# EAGLE board SparkFun LoRaSerial - 1W-Panel (EAGLE 9.6.2), part 1 of 4
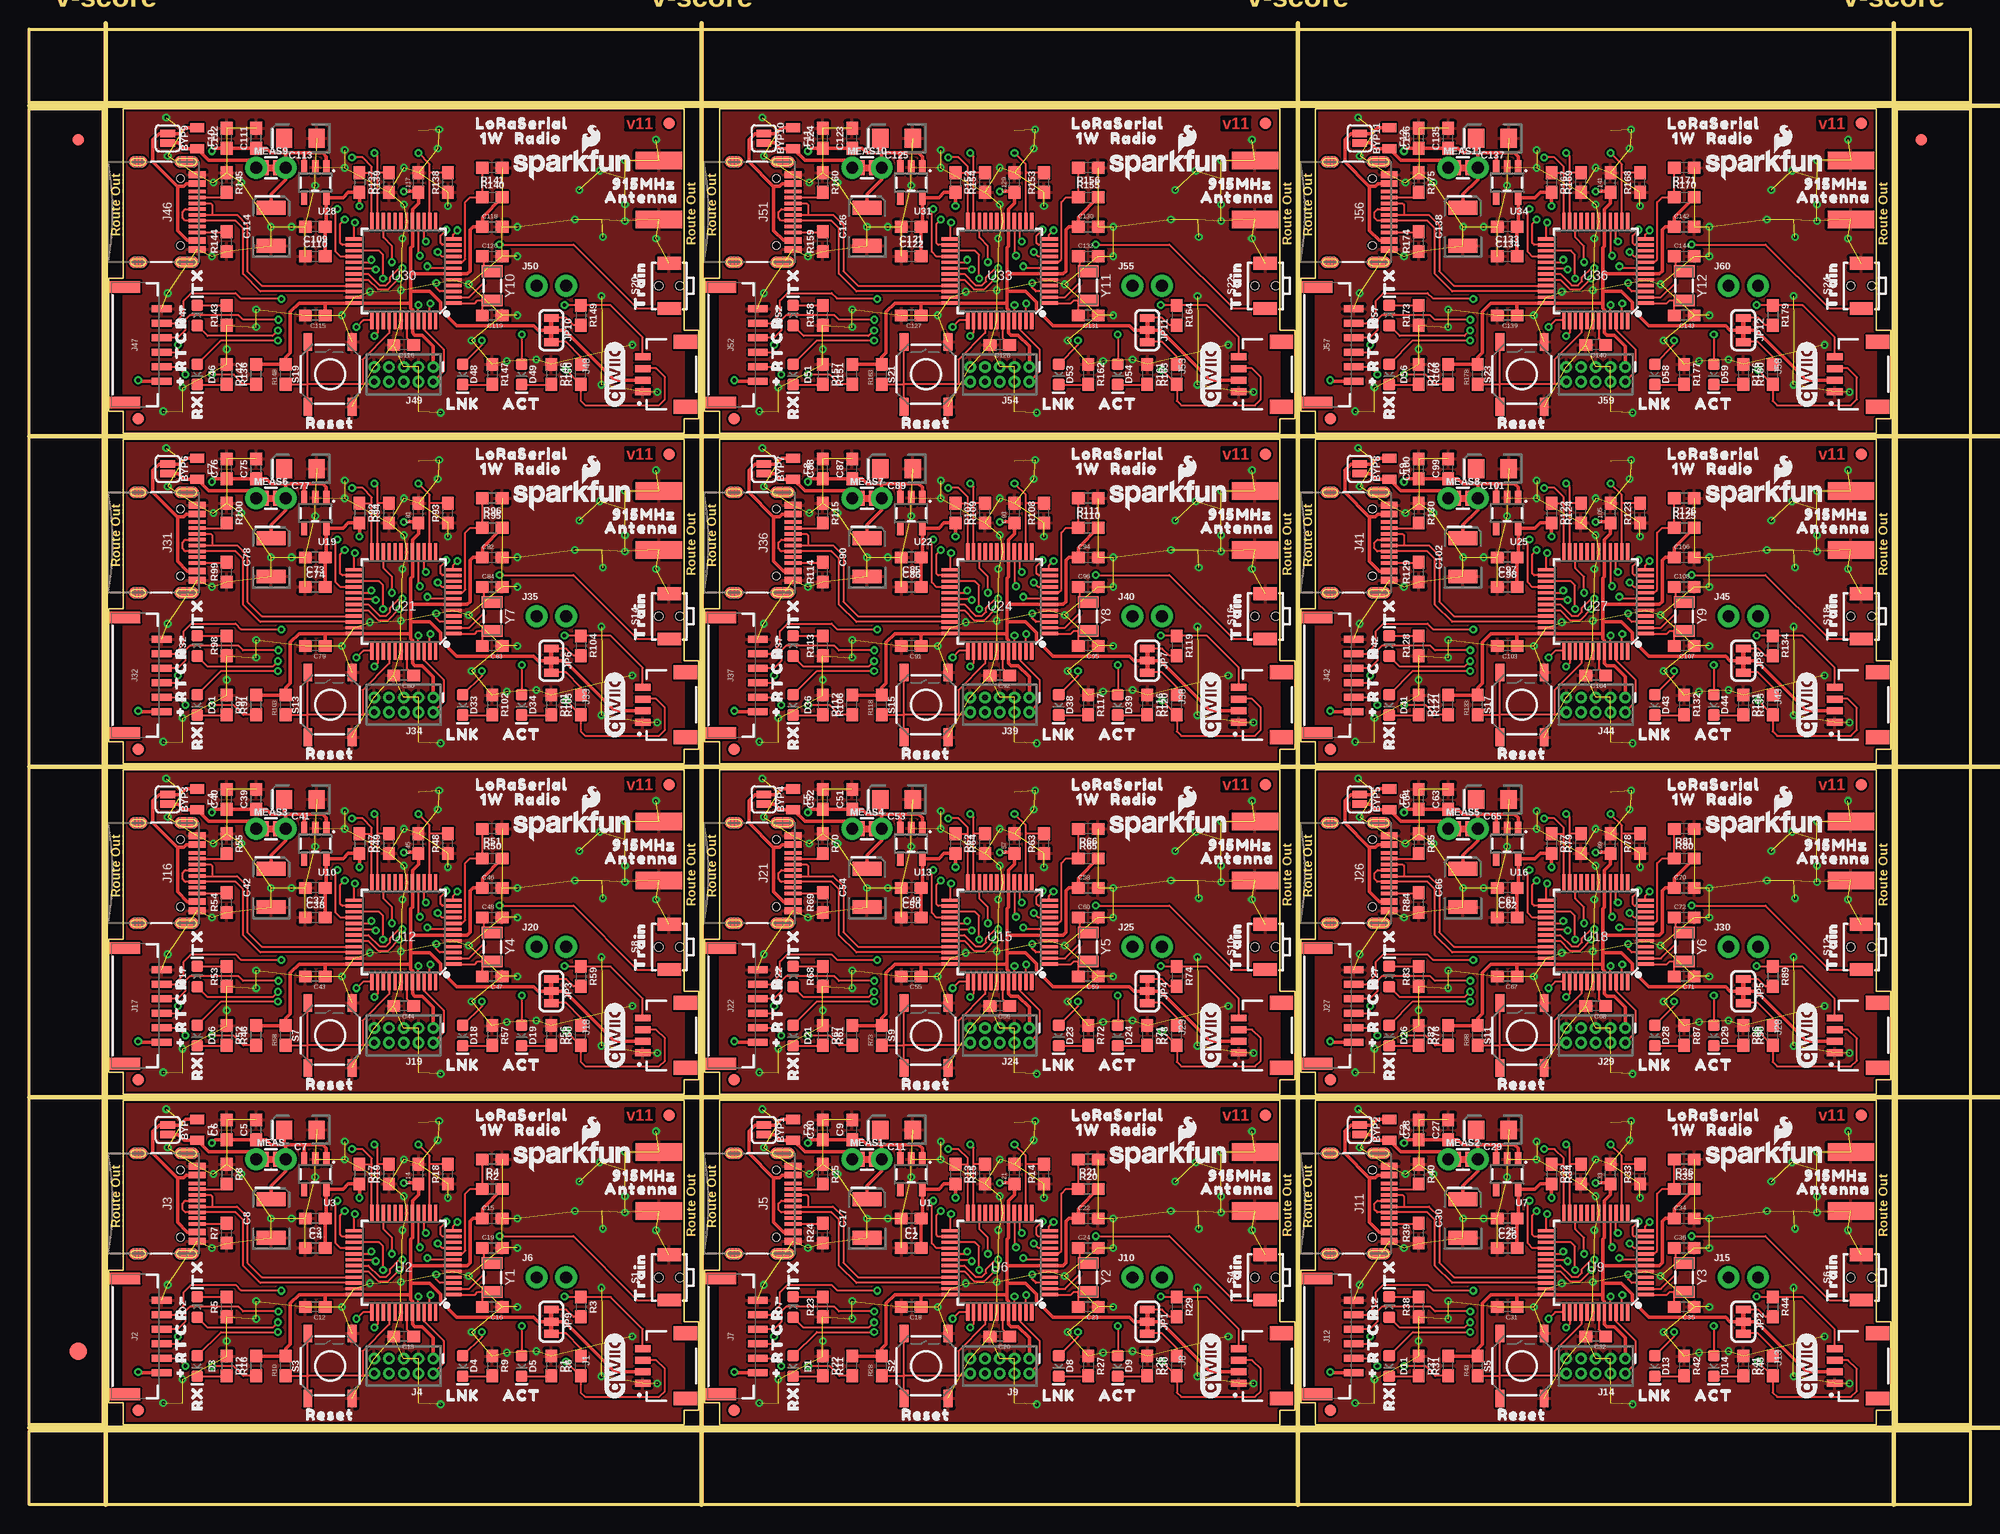
[diagram p0: board, top side]
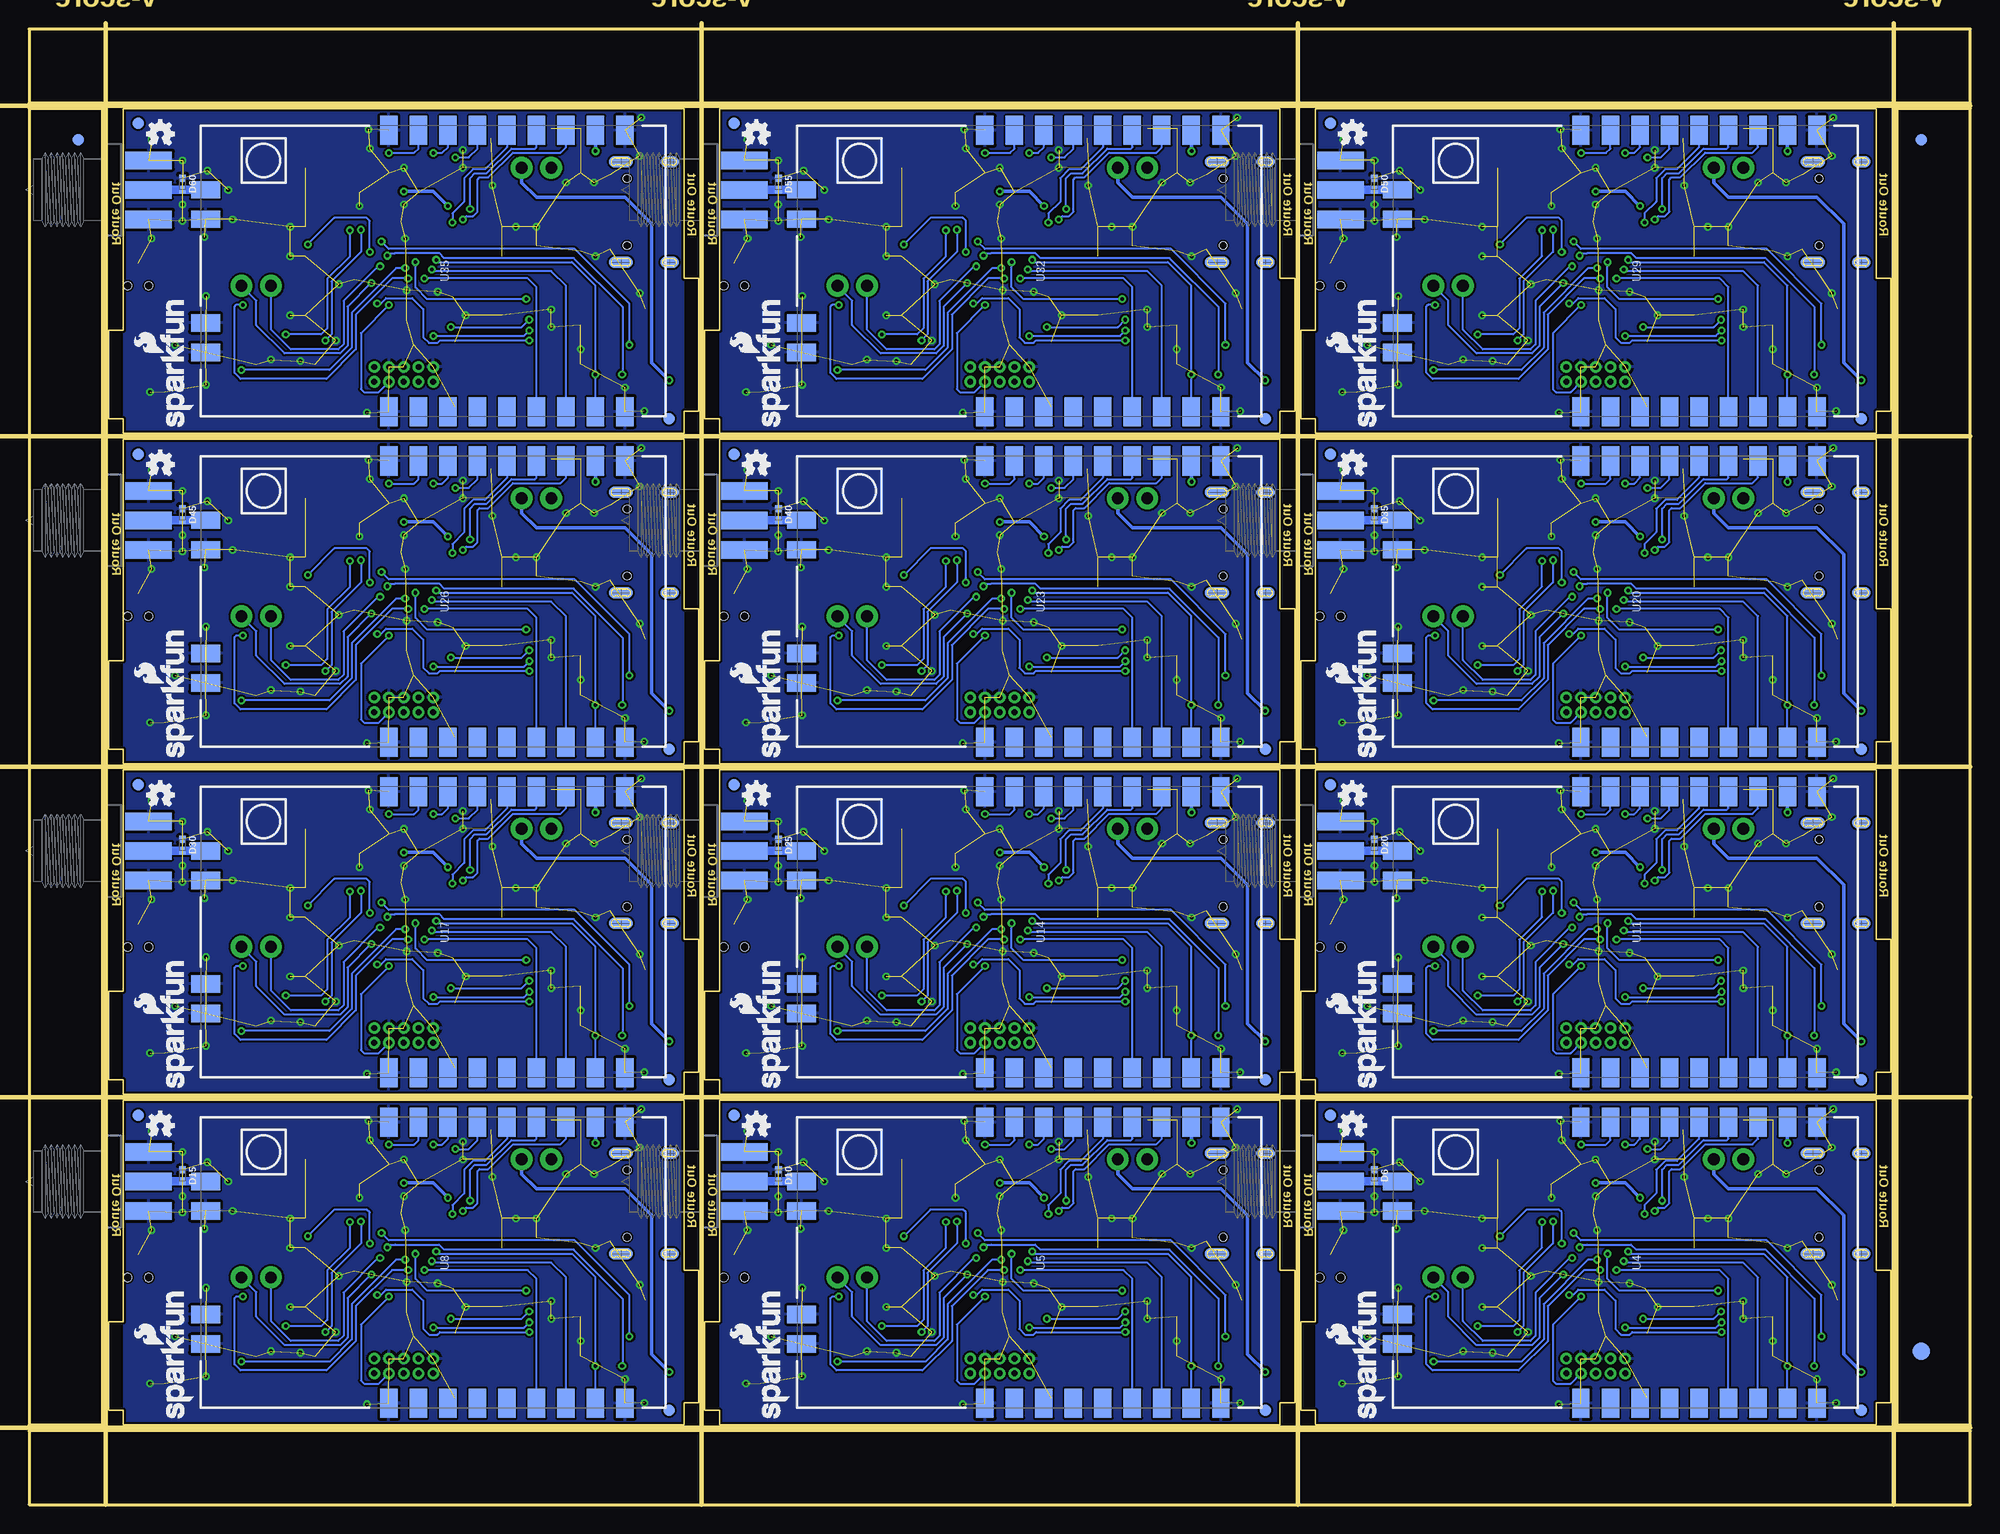
[diagram p1: board, bottom side, seen from below]

Size 167.13 x 127 mm. Coordinates in mm from the lower left corner, seen from the top.
Outline: 8.13,6.86 8.13,8.76 6.86,8.76 6.86,20.19 8.13,20.19 8.13,34.8 56.39,34.8 56.39,15.75 57.66,15.75 57.66,8.13 56.39,8.13 56.39,6.86 8.13,6.86
Outline: 59.44,6.86 59.44,8.76 58.17,8.76 58.17,20.19 59.44,20.19 59.44,34.8 107.7,34.8 107.7,15.75 108.97,15.75 108.97,8.13 107.7,8.13 107.7,6.86 59.44,6.86
Outline: 110.74,6.86 110.74,8.76 109.47,8.76 109.47,20.19 110.74,20.19 110.74,34.8 159,34.8 159,15.75 160.27,15.75 160.27,8.13 159,8.13 159,6.86 110.74,6.86
Outline: 8.13,35.31 8.13,37.21 6.86,37.21 6.86,48.64 8.13,48.64 8.13,63.25 56.39,63.25 56.39,44.2 57.66,44.2 57.66,36.58 56.39,36.58 56.39,35.31 8.13,35.31
Outline: 59.44,35.31 59.44,37.21 58.17,37.21 58.17,48.64 59.44,48.64 59.44,63.25 107.7,63.25 107.7,44.2 108.97,44.2 108.97,36.58 107.7,36.58 107.7,35.31 59.44,35.31
Outline: 110.74,35.31 110.74,37.21 109.47,37.21 109.47,48.64 110.74,48.64 110.74,63.25 159,63.25 159,44.2 160.27,44.2 160.27,36.58 159,36.58 159,35.31 110.74,35.31
Outline: 8.13,63.75 8.13,65.66 6.86,65.66 6.86,77.09 8.13,77.09 8.13,91.69 56.39,91.69 56.39,72.64 57.66,72.64 57.66,65.02 56.39,65.02 56.39,63.75 8.13,63.75
Outline: 59.44,63.75 59.44,65.66 58.17,65.66 58.17,77.09 59.44,77.09 59.44,91.69 107.7,91.69 107.7,72.64 108.97,72.64 108.97,65.02 107.7,65.02 107.7,63.75 59.44,63.75
Outline: 110.74,63.75 110.74,65.66 109.47,65.66 109.47,77.09 110.74,77.09 110.74,91.69 159,91.69 159,72.64 160.27,72.64 160.27,65.02 159,65.02 159,63.75 110.74,63.75
Outline: 8.13,92.2 8.13,94.11 6.86,94.11 6.86,105.54 8.13,105.54 8.13,120.14 56.39,120.14 56.39,101.09 57.66,101.09 57.66,93.47 56.39,93.47 56.39,92.2 8.13,92.2
Outline: 59.44,92.2 59.44,94.11 58.17,94.11 58.17,105.54 59.44,105.54 59.44,120.14 107.7,120.14 107.7,101.09 108.97,101.09 108.97,93.47 107.7,93.47 107.7,92.2 59.44,92.2
Outline: 110.74,92.2 110.74,94.11 109.47,94.11 109.47,105.54 110.74,105.54 110.74,120.14 159,120.14 159,101.09 160.27,101.09 160.27,93.47 159,93.47 159,92.2 110.74,92.2
Outline: 0,6.35 167.13,6.35 167.13,0 0,0 0,6.35
Outline: 160.78,120.14 167.13,120.14 167.13,6.86 160.78,6.86 160.78,120.14
Outline: 0,127 167.13,127 167.13,120.65 0,120.65 0,127
Outline: 0,120.14 6.35,120.14 6.35,6.86 0,6.86 0,120.14
Copper layers (1*16): Top 0.035mm / dielectric 1.5mm / Bottom 0.035mm
Design rules "SparkFun LoRaSerial - 1W": minimum track width 7mil, minimum drill 0.3mm, track to track 7mil, track to pad 7mil, pad to pad 7mil, via to via 7mil, smd to smd 7mil, copper to edge 7mil, drill to drill 7mil, minimum pad ring 7mil, minimum via ring 7mil, stop-mask expansion 3mil, vias tented up to drill 25mil, thermal gap 10mil
Net classes: 1 3.3V: width 0.305 mm
Milling: 9 lines

## Footprints (pad centres in the part's own frame; a part is rotated, then mirrored left to right if it is on the bottom)
SMT-JUMPER_2_NO_SILK = smd 0.635 x 1.27: 1 -0.406,0; 2 0.406,0
0603 = smd 1.1 x 1: 1 -0.85,0; 2 0.85,0
EIA3216 = smd 1.4 x 1.6: + 1.4,0; - -1.4,0
EIA3528 = smd 1.2 x 2.5: A 1.65,0; C -1.65,0
LED-0603 = smd 1 x 1: A -0.877,0; C 0.877,0
0402-TIGHT = smd 0.6 x 0.6: 1 -0.5,0; 2 0.5,0
RP-SMA-EDGE = smd 1.5 x 4: GND@0 -2.54,0; GND@1 2.54,0; SIG 0,0 | smd 1.5 x 4 bottom: GND@2 -2.54,0; GND@3 2.54,0
FIDUCIAL-1X2 = smd 1 x 1: 1 0,0
FIDUCIAL-1.5X3 = smd 1.5 x 1.5: 1 0,0
0805 = smd 0.8 x 1.2: 1 -0.9,0; 2 0.9,0
JST04_1MM_RA = smd 0.6 x 1.35: 1 -1.5,0; 2 -0.5,0; 3 0.5,0; 4 1.5,0 | smd 1.2 x 2: NC1 2.8,-3.675; NC2 -2.8,-3.675
JST-6-SMD-1.25MM-LOCKING = smd 0.6 x 1.7: 1 -3.125,3.3; 2 -1.875,3.3; 3 -0.625,3.3; 4 0.625,3.3; 5 1.875,3.3; 6 3.125,3.3 | smd 1 x 2.7: NC1 4.975,0.1; NC2 -4.975,0.1
USB-C-16P = smd 0.3 x 1.45: A5 -1.25,0; A6 -0.25,0; A7 0.25,0; A8 1.25,0; B5 1.75,0; B6 0.75,0; B7 -0.75,0; B8 -1.75,0 | smd 0.6 x 1.45: GND -3.225,0; GND2 3.225,0 | smd 1 x 2.1: SHLD1 -4.32,-0.915; SHLD2 4.32,-0.915 | smd 1 x 2.1 bottom: SHLD3 -4.32,-0.915; SHLD4 4.32,-0.915 | smd 1 x 1.6: SHLD5 -4.32,-5.095; SHLD8 4.32,-5.095 | smd 1 x 1.6 bottom: SHLD6 -4.32,-5.095; SHLD7 4.32,-5.095 | smd 0.55 x 1.45: VBUS1 -2.45,0; VBUS2 2.45,0 | hole 0.65: -2.89,-1.445; 2.89,-1.445
2X5-PTH-1.27MM-NO_SILK = drill 0.508 pad 1: 1 -2.54,-0.635; 2 -2.54,0.635; 3 -1.27,-0.635; 4 -1.27,0.635; 5 0,-0.635; 6 0,0.635; 7 1.27,-0.635; 8 1.27,0.635; 9 2.54,-0.635; 10 2.54,0.635
1X02_NO_SILK = drill 1.016 pad 1.88: 1 0,0; 2 2.54,0
SMT-JUMPER_3_2-NC_TRACE_SILK = smd 0.66 x 1.27: 1 -1.041,0; 2 0,0; 3 1.041,0
COMBO-JUMPER_2_NC_TRACE = smd 0.635 x 1.27: 1 -0.508,0; 2 0.508,0 | drill 1.016 pad 1.88: 3 -1.27,0; 4 1.27,0
TACTILE_SWITCH_SMD_RIGHT_ANGLE = smd 1.1 x 2: 1 -1.95,0; 2 1.95,0 | hole 0.7: 0,0.9; 0,-0.9
TACTILE_SWITCH_SMD_5.2MM = smd 1.524 x 0.762: 1 -2.794,1.905; 2 2.794,1.905; 3 -2.794,-1.905; 4 2.794,-1.905
SOT23-5 = smd 0.55 x 1.2: 1 -0.95,-1.3; 2 0,-1.3; 3 0.95,-1.3; 4 0.95,1.3; 5 -0.95,1.3
TQFP-48 = smd 1.5 x 0.28: 1 -4.25,2.75; 2 -4.25,2.25; 3 -4.25,1.75; 4 -4.25,1.25; 5 -4.25,0.75; 6 -4.25,0.25; 7 -4.25,-0.25; 8 -4.25,-0.75; 9 -4.25,-1.25; 10 -4.25,-1.75; 11 -4.25,-2.25; 12 -4.25,-2.75; 25 4.25,-2.75; 26 4.25,-2.25; 27 4.25,-1.75; 28 4.25,-1.25; 29 4.25,-0.75; 30 4.25,-0.25; 31 4.25,0.25; 32 4.25,0.75; 33 4.25,1.25; 34 4.25,1.75; 35 4.25,2.25; 36 4.25,2.75 | smd 0.28 x 1.5: 13 -2.75,-4.25; 14 -2.25,-4.25; 15 -1.75,-4.25; 16 -1.25,-4.25; 17 -0.75,-4.25; 18 -0.25,-4.25; 19 0.25,-4.25; 20 0.75,-4.25; 21 1.25,-4.25; 22 1.75,-4.25; 23 2.25,-4.25; 24 2.75,-4.25; 37 2.75,4.25; 38 2.25,4.25; 39 1.75,4.25; 40 1.25,4.25; 41 0.75,4.25; 42 0.25,4.25; 43 -0.25,4.25; 44 -0.75,4.25; 45 -1.25,4.25; 46 -1.75,4.25; 47 -2.25,4.25; 48 -2.75,4.25
E19-915MS1W = smd 2.5 x 1.5: 1 12.1,-3.82; 2 12.1,-1.28; 3 12.1,1.26; 4 12.1,3.8; 5 12.1,6.34; 6 12.1,8.88; 7 12.1,11.42; 8 12.1,13.96; 9 12.1,16.5; 10 -12.1,16.5; 11 -12.1,13.96; 12 -12.1,11.42; 13 -12.1,8.88; 14 -12.1,6.34; 15 -12.1,3.8; 16 -12.1,1.26; 17 -12.1,-1.28; 18 -12.1,-3.82 | smd 1.5 x 2.5: 19 -7,-19.6; 20 -4.46,-19.6; 21 4.46,-19.6; 22 7,-19.6
CRYSTAL-SMD-3.2X1.5MM = smd 1 x 1.8: P$1 -1.25,0; P$2 1.25,0

## Placement (x,y rotation side)
BYP  JUMPER-SMT_2_NO_SILK  [SMT-JUMPER_2_NO_SILK]  11.94,32.26 270 top
BYP1  JUMPER-SMT_2_NO_SILK  [SMT-JUMPER_2_NO_SILK]  63.25,32.26 270 top
BYP2  JUMPER-SMT_2_NO_SILK  [SMT-JUMPER_2_NO_SILK]  114.55,32.26 270 top
BYP3  JUMPER-SMT_2_NO_SILK  [SMT-JUMPER_2_NO_SILK]  11.94,60.71 270 top
BYP4  JUMPER-SMT_2_NO_SILK  [SMT-JUMPER_2_NO_SILK]  63.25,60.71 270 top
BYP5  JUMPER-SMT_2_NO_SILK  [SMT-JUMPER_2_NO_SILK]  114.55,60.71 270 top
BYP6  JUMPER-SMT_2_NO_SILK  [SMT-JUMPER_2_NO_SILK]  11.94,89.15 270 top
BYP7  JUMPER-SMT_2_NO_SILK  [SMT-JUMPER_2_NO_SILK]  63.25,89.15 270 top
BYP8  JUMPER-SMT_2_NO_SILK  [SMT-JUMPER_2_NO_SILK]  114.55,89.15 270 top
BYP9  JUMPER-SMT_2_NO_SILK  [SMT-JUMPER_2_NO_SILK]  11.94,117.6 270 top
BYP10  JUMPER-SMT_2_NO_SILK  [SMT-JUMPER_2_NO_SILK]  63.25,117.6 270 top
BYP11  JUMPER-SMT_2_NO_SILK  [SMT-JUMPER_2_NO_SILK]  114.55,117.6 270 top
C1  1.0uF  [0603]  75.95,24.64 180 top
C2  0.1uF  [0603]  75.95,22.1 0 top
C3  1.0uF  [0603]  24.64,24.64 180 top
C4  0.1uF  [0603]  24.64,22.1 0 top
C5  0.22uF  [0603]  19.56,32.26 90 top
C6  0.1uF  [0603]  17.02,32.26 90 top
C7  10uF  [EIA3216]  23.37,32.26 180 top
C8  47uF  [EIA3528]  20.83,24.64 90 top
C9  0.22uF  [0603]  70.87,32.26 90 top
C10  0.1uF  [0603]  68.33,32.26 90 top
C11  10uF  [EIA3216]  74.68,32.26 180 top
C12  0.1uF  [0603]  24.64,17.02 180 top
C13  0.1uF  [0603]  32.26,14.48 180 top
C14  0.1uF  [0603]  33.53,28.45 90 top
C15  0.1uF  [0603]  39.88,24.64 0 top
C16  15pF  [0603]  39.88,17.02 180 top
C17  47uF  [EIA3528]  72.14,24.64 90 top
C18  0.1uF  [0603]  75.95,17.02 180 top
C19  15pF  [0603]  39.88,22.1 0 top
C20  0.1uF  [0603]  83.57,14.48 180 top
C21  0.1uF  [0603]  84.84,28.45 90 top
C22  0.1uF  [0603]  91.19,24.64 0 top
C23  15pF  [0603]  91.19,17.02 180 top
C24  15pF  [0603]  91.19,22.1 0 top
C25  1.0uF  [0603]  127.25,24.64 180 top
C26  0.1uF  [0603]  127.25,22.1 0 top
C27  0.22uF  [0603]  122.17,32.26 90 top
C28  0.1uF  [0603]  119.63,32.26 90 top
C29  10uF  [EIA3216]  125.98,32.26 180 top
C30  47uF  [EIA3528]  123.44,24.64 90 top
C31  0.1uF  [0603]  127.25,17.02 180 top
C32  0.1uF  [0603]  134.87,14.48 180 top
C33  0.1uF  [0603]  136.14,28.45 90 top
C34  0.1uF  [0603]  142.49,24.64 0 top
C35  15pF  [0603]  142.49,17.02 180 top
C36  15pF  [0603]  142.49,22.1 0 top
C37  1.0uF  [0603]  24.64,53.09 180 top
C38  0.1uF  [0603]  24.64,50.55 0 top
C39  0.22uF  [0603]  19.56,60.71 90 top
C40  0.1uF  [0603]  17.02,60.71 90 top
C41  10uF  [EIA3216]  23.37,60.71 180 top
C42  47uF  [EIA3528]  20.83,53.09 90 top
C43  0.1uF  [0603]  24.64,45.47 180 top
C44  0.1uF  [0603]  32.26,42.93 180 top
C45  0.1uF  [0603]  33.53,56.9 90 top
C46  0.1uF  [0603]  39.88,53.09 0 top
C47  15pF  [0603]  39.88,45.47 180 top
C48  15pF  [0603]  39.88,50.55 0 top
C49  1.0uF  [0603]  75.95,53.09 180 top
C50  0.1uF  [0603]  75.95,50.55 0 top
C51  0.22uF  [0603]  70.87,60.71 90 top
C52  0.1uF  [0603]  68.33,60.71 90 top
C53  10uF  [EIA3216]  74.68,60.71 180 top
C54  47uF  [EIA3528]  72.14,53.09 90 top
C55  0.1uF  [0603]  75.95,45.47 180 top
C56  0.1uF  [0603]  83.57,42.93 180 top
C57  0.1uF  [0603]  84.84,56.9 90 top
C58  0.1uF  [0603]  91.19,53.09 0 top
C59  15pF  [0603]  91.19,45.47 180 top
C60  15pF  [0603]  91.19,50.55 0 top
C61  1.0uF  [0603]  127.25,53.09 180 top
C62  0.1uF  [0603]  127.25,50.55 0 top
C63  0.22uF  [0603]  122.17,60.71 90 top
C64  0.1uF  [0603]  119.63,60.71 90 top
C65  10uF  [EIA3216]  125.98,60.71 180 top
C66  47uF  [EIA3528]  123.44,53.09 90 top
C67  0.1uF  [0603]  127.25,45.47 180 top
C68  0.1uF  [0603]  134.87,42.93 180 top
C69  0.1uF  [0603]  136.14,56.9 90 top
C70  0.1uF  [0603]  142.49,53.09 0 top
C71  15pF  [0603]  142.49,45.47 180 top
C72  15pF  [0603]  142.49,50.55 0 top
C73  1.0uF  [0603]  24.64,81.53 180 top
C74  0.1uF  [0603]  24.64,78.99 0 top
C75  0.22uF  [0603]  19.56,89.15 90 top
C76  0.1uF  [0603]  17.02,89.15 90 top
C77  10uF  [EIA3216]  23.37,89.15 180 top
C78  47uF  [EIA3528]  20.83,81.53 90 top
C79  0.1uF  [0603]  24.64,73.91 180 top
C80  0.1uF  [0603]  32.26,71.37 180 top
C81  0.1uF  [0603]  33.53,85.34 90 top
C82  0.1uF  [0603]  39.88,81.53 0 top
C83  15pF  [0603]  39.88,73.91 180 top
C84  15pF  [0603]  39.88,78.99 0 top
C85  1.0uF  [0603]  75.95,81.53 180 top
C86  0.1uF  [0603]  75.95,78.99 0 top
C87  0.22uF  [0603]  70.87,89.15 90 top
C88  0.1uF  [0603]  68.33,89.15 90 top
C89  10uF  [EIA3216]  74.68,89.15 180 top
C90  47uF  [EIA3528]  72.14,81.53 90 top
C91  0.1uF  [0603]  75.95,73.91 180 top
C92  0.1uF  [0603]  83.57,71.37 180 top
C93  0.1uF  [0603]  84.84,85.34 90 top
C94  0.1uF  [0603]  91.19,81.53 0 top
C95  15pF  [0603]  91.19,73.91 180 top
C96  15pF  [0603]  91.19,78.99 0 top
C97  1.0uF  [0603]  127.25,81.53 180 top
C98  0.1uF  [0603]  127.25,78.99 0 top
C99  0.22uF  [0603]  122.17,89.15 90 top
C100  0.1uF  [0603]  119.63,89.15 90 top
C101  10uF  [EIA3216]  125.98,89.15 180 top
C102  47uF  [EIA3528]  123.44,81.53 90 top
C103  0.1uF  [0603]  127.25,73.91 180 top
C104  0.1uF  [0603]  134.87,71.37 180 top
C105  0.1uF  [0603]  136.14,85.34 90 top
C106  0.1uF  [0603]  142.49,81.53 0 top
C107  15pF  [0603]  142.49,73.91 180 top
C108  15pF  [0603]  142.49,78.99 0 top
C109  1.0uF  [0603]  24.64,109.98 180 top
C110  0.1uF  [0603]  24.64,107.44 0 top
C111  0.22uF  [0603]  19.56,117.6 90 top
C112  0.1uF  [0603]  17.02,117.6 90 top
C113  10uF  [EIA3216]  23.37,117.6 180 top
C114  47uF  [EIA3528]  20.83,109.98 90 top
C115  0.1uF  [0603]  24.64,102.36 180 top
C116  0.1uF  [0603]  32.26,99.82 180 top
C117  0.1uF  [0603]  33.53,113.79 90 top
C118  0.1uF  [0603]  39.88,109.98 0 top
C119  15pF  [0603]  39.88,102.36 180 top
C120  15pF  [0603]  39.88,107.44 0 top
C121  1.0uF  [0603]  75.95,109.98 180 top
C122  0.1uF  [0603]  75.95,107.44 0 top
C123  0.22uF  [0603]  70.87,117.6 90 top
C124  0.1uF  [0603]  68.33,117.6 90 top
C125  10uF  [EIA3216]  74.68,117.6 180 top
C126  47uF  [EIA3528]  72.14,109.98 90 top
C127  0.1uF  [0603]  75.95,102.36 180 top
C128  0.1uF  [0603]  83.57,99.82 180 top
C129  0.1uF  [0603]  84.84,113.79 90 top
C130  0.1uF  [0603]  91.19,109.98 0 top
C131  15pF  [0603]  91.19,102.36 180 top
C132  15pF  [0603]  91.19,107.44 0 top
C133  1.0uF  [0603]  127.25,109.98 180 top
C134  0.1uF  [0603]  127.25,107.44 0 top
C135  0.22uF  [0603]  122.17,117.6 90 top
C136  0.1uF  [0603]  119.63,117.6 90 top
C137  10uF  [EIA3216]  125.98,117.6 180 top
C138  47uF  [EIA3528]  123.44,109.98 90 top
C139  0.1uF  [0603]  127.25,102.36 180 top
C140  0.1uF  [0603]  134.87,99.82 180 top
C141  0.1uF  [0603]  136.14,113.79 90 top
C142  0.1uF  [0603]  142.49,109.98 0 top
C143  15pF  [0603]  142.49,102.36 180 top
C144  15pF  [0603]  142.49,107.44 0 top
D1  Yellow  [LED-0603]  65.79,11.94 270 top
D2  GREEN  [LED-0603]  14.48,17.02 90 top
D3  Yellow  [LED-0603]  14.48,11.94 270 top
D4  BLUE  [LED-0603]  37.34,11.94 270 top
D5  RED  [LED-0603]  42.42,11.94 270 top
D6  PESD0402  [0402-TIGHT]  51.31,28.32 270 bottom
D7  GREEN  [LED-0603]  65.79,17.02 90 top
D8  BLUE  [LED-0603]  88.65,11.94 270 top
D9  RED  [LED-0603]  93.73,11.94 270 top
D10  PESD0402  [0402-TIGHT]  102.62,28.32 270 bottom
D11  Yellow  [LED-0603]  117.09,11.94 270 top
D12  GREEN  [LED-0603]  117.09,17.02 90 top
D13  BLUE  [LED-0603]  139.95,11.94 270 top
D14  RED  [LED-0603]  145.03,11.94 270 top
D15  PESD0402  [0402-TIGHT]  153.92,28.32 270 bottom
D16  Yellow  [LED-0603]  14.48,40.39 270 top
D17  GREEN  [LED-0603]  14.48,45.47 90 top
D18  BLUE  [LED-0603]  37.34,40.39 270 top
D19  RED  [LED-0603]  42.42,40.39 270 top
D20  PESD0402  [0402-TIGHT]  51.31,56.77 270 bottom
D21  Yellow  [LED-0603]  65.79,40.39 270 top
D22  GREEN  [LED-0603]  65.79,45.47 90 top
D23  BLUE  [LED-0603]  88.65,40.39 270 top
D24  RED  [LED-0603]  93.73,40.39 270 top
D25  PESD0402  [0402-TIGHT]  102.62,56.77 270 bottom
D26  Yellow  [LED-0603]  117.09,40.39 270 top
D27  GREEN  [LED-0603]  117.09,45.47 90 top
D28  BLUE  [LED-0603]  139.95,40.39 270 top
D29  RED  [LED-0603]  145.03,40.39 270 top
D30  PESD0402  [0402-TIGHT]  153.92,56.77 270 bottom
D31  Yellow  [LED-0603]  14.48,68.83 270 top
D32  GREEN  [LED-0603]  14.48,73.91 90 top
D33  BLUE  [LED-0603]  37.34,68.83 270 top
D34  RED  [LED-0603]  42.42,68.83 270 top
D35  PESD0402  [0402-TIGHT]  51.31,85.22 270 bottom
D36  Yellow  [LED-0603]  65.79,68.83 270 top
D37  GREEN  [LED-0603]  65.79,73.91 90 top
D38  BLUE  [LED-0603]  88.65,68.83 270 top
D39  RED  [LED-0603]  93.73,68.83 270 top
D40  PESD0402  [0402-TIGHT]  102.62,85.22 270 bottom
D41  Yellow  [LED-0603]  117.09,68.83 270 top
D42  GREEN  [LED-0603]  117.09,73.91 90 top
D43  BLUE  [LED-0603]  139.95,68.83 270 top
D44  RED  [LED-0603]  145.03,68.83 270 top
D45  PESD0402  [0402-TIGHT]  153.92,85.22 270 bottom
D46  Yellow  [LED-0603]  14.48,97.28 270 top
D47  GREEN  [LED-0603]  14.48,102.36 90 top
D48  BLUE  [LED-0603]  37.34,97.28 270 top
D49  RED  [LED-0603]  42.42,97.28 270 top
D50  PESD0402  [0402-TIGHT]  51.31,113.67 270 bottom
D51  Yellow  [LED-0603]  65.79,97.28 270 top
D52  GREEN  [LED-0603]  65.79,102.36 90 top
D53  BLUE  [LED-0603]  88.65,97.28 270 top
D54  RED  [LED-0603]  93.73,97.28 270 top
D55  PESD0402  [0402-TIGHT]  102.62,113.67 270 bottom
D56  Yellow  [LED-0603]  117.09,97.28 270 top
D57  GREEN  [LED-0603]  117.09,102.36 90 top
D58  BLUE  [LED-0603]  139.95,97.28 270 top
D59  RED  [LED-0603]  145.03,97.28 270 top
D60  PESD0402  [0402-TIGHT]  153.92,113.67 270 bottom
E1  RP-SMA  [RP-SMA-EDGE]  105.54,27.81 90 bottom
E2  RP-SMA  [RP-SMA-EDGE]  54.23,27.81 90 bottom
E3  RP-SMA  [RP-SMA-EDGE]  156.84,27.81 90 bottom
E4  RP-SMA  [RP-SMA-EDGE]  54.23,56.26 90 bottom
E5  RP-SMA  [RP-SMA-EDGE]  105.54,56.26 90 bottom
E6  RP-SMA  [RP-SMA-EDGE]  156.84,56.26 90 bottom
E7  RP-SMA  [RP-SMA-EDGE]  54.23,84.71 90 bottom
E8  RP-SMA  [RP-SMA-EDGE]  105.54,84.71 90 bottom
E9  RP-SMA  [RP-SMA-EDGE]  156.84,84.71 90 bottom
E10  RP-SMA  [RP-SMA-EDGE]  54.23,113.16 90 bottom
E11  RP-SMA  [RP-SMA-EDGE]  105.54,113.16 90 bottom
E12  RP-SMA  [RP-SMA-EDGE]  156.84,113.16 90 bottom
E$1  [FIDUCIAL-1X2]  4.23,117.48 0 top
E$2  [FIDUCIAL-1X2]  4.23,117.48 0 bottom
E$3  [FIDUCIAL-1X2]  162.9,117.48 0 top
E$4  [FIDUCIAL-1X2]  162.9,117.48 0 bottom
E$5  [FIDUCIAL-1.5X3]  4.23,13.21 0 top
E$6  [FIDUCIAL-1.5X3]  4.23,13.21 0 bottom
F1  6V 0.5A  [0805]  14.48,32.26 270 top
F2  6V 0.5A  [0805]  65.79,32.26 270 top
F3  6V 0.5A  [0805]  117.09,32.26 270 top
F4  6V 0.5A  [0805]  14.48,60.71 270 top
F5  6V 0.5A  [0805]  65.79,60.71 270 top
F6  6V 0.5A  [0805]  117.09,60.71 270 top
F7  6V 0.5A  [0805]  14.48,89.15 270 top
F8  6V 0.5A  [0805]  65.79,89.15 270 top
F9  6V 0.5A  [0805]  117.09,89.15 270 top
F10  6V 0.5A  [0805]  14.48,117.6 270 top
F11  6V 0.5A  [0805]  65.79,117.6 270 top
F12  6V 0.5A  [0805]  117.09,117.6 270 top
FID1  FIDUCIAL1X2  [FIDUCIAL-1X2]  9.4,8.13 0 bottom
FID2  FIDUCIAL1X2  [FIDUCIAL-1X2]  55.12,33.53 0 bottom
FID3  FIDUCIAL1X2  [FIDUCIAL-1X2]  55.12,33.53 0 top
FID4  FIDUCIAL1X2  [FIDUCIAL-1X2]  9.4,8.13 0 top
FID5  FIDUCIAL1X2  [FIDUCIAL-1X2]  60.71,8.13 0 bottom
FID6  FIDUCIAL1X2  [FIDUCIAL-1X2]  106.43,33.53 0 bottom
FID7  FIDUCIAL1X2  [FIDUCIAL-1X2]  106.43,33.53 0 top
FID8  FIDUCIAL1X2  [FIDUCIAL-1X2]  60.71,8.13 0 top
FID9  FIDUCIAL1X2  [FIDUCIAL-1X2]  112.01,8.13 0 bottom
FID10  FIDUCIAL1X2  [FIDUCIAL-1X2]  157.73,33.53 0 bottom
FID11  FIDUCIAL1X2  [FIDUCIAL-1X2]  157.73,33.53 0 top
FID12  FIDUCIAL1X2  [FIDUCIAL-1X2]  112.01,8.13 0 top
FID13  FIDUCIAL1X2  [FIDUCIAL-1X2]  9.4,36.58 0 bottom
FID14  FIDUCIAL1X2  [FIDUCIAL-1X2]  55.12,61.98 0 bottom
FID15  FIDUCIAL1X2  [FIDUCIAL-1X2]  55.12,61.98 0 top
FID16  FIDUCIAL1X2  [FIDUCIAL-1X2]  9.4,36.58 0 top
FID17  FIDUCIAL1X2  [FIDUCIAL-1X2]  60.71,36.58 0 bottom
FID18  FIDUCIAL1X2  [FIDUCIAL-1X2]  106.43,61.98 0 bottom
FID19  FIDUCIAL1X2  [FIDUCIAL-1X2]  106.43,61.98 0 top
FID20  FIDUCIAL1X2  [FIDUCIAL-1X2]  60.71,36.58 0 top
FID21  FIDUCIAL1X2  [FIDUCIAL-1X2]  112.01,36.58 0 bottom
FID22  FIDUCIAL1X2  [FIDUCIAL-1X2]  157.73,61.98 0 bottom
FID23  FIDUCIAL1X2  [FIDUCIAL-1X2]  157.73,61.98 0 top
FID24  FIDUCIAL1X2  [FIDUCIAL-1X2]  112.01,36.58 0 top
FID25  FIDUCIAL1X2  [FIDUCIAL-1X2]  9.4,65.02 0 bottom
FID26  FIDUCIAL1X2  [FIDUCIAL-1X2]  55.12,90.42 0 bottom
FID27  FIDUCIAL1X2  [FIDUCIAL-1X2]  55.12,90.42 0 top
FID28  FIDUCIAL1X2  [FIDUCIAL-1X2]  9.4,65.02 0 top
FID29  FIDUCIAL1X2  [FIDUCIAL-1X2]  60.71,65.02 0 bottom
FID30  FIDUCIAL1X2  [FIDUCIAL-1X2]  106.43,90.42 0 bottom
FID31  FIDUCIAL1X2  [FIDUCIAL-1X2]  106.43,90.42 0 top
FID32  FIDUCIAL1X2  [FIDUCIAL-1X2]  60.71,65.02 0 top
FID33  FIDUCIAL1X2  [FIDUCIAL-1X2]  112.01,65.02 0 bottom
FID34  FIDUCIAL1X2  [FIDUCIAL-1X2]  157.73,90.42 0 bottom
FID35  FIDUCIAL1X2  [FIDUCIAL-1X2]  157.73,90.42 0 top
FID36  FIDUCIAL1X2  [FIDUCIAL-1X2]  112.01,65.02 0 top
FID37  FIDUCIAL1X2  [FIDUCIAL-1X2]  9.4,93.47 0 bottom
FID38  FIDUCIAL1X2  [FIDUCIAL-1X2]  55.12,118.87 0 bottom
FID39  FIDUCIAL1X2  [FIDUCIAL-1X2]  55.12,118.87 0 top
FID40  FIDUCIAL1X2  [FIDUCIAL-1X2]  9.4,93.47 0 top
FID41  FIDUCIAL1X2  [FIDUCIAL-1X2]  60.71,93.47 0 bottom
FID42  FIDUCIAL1X2  [FIDUCIAL-1X2]  106.43,118.87 0 bottom
FID43  FIDUCIAL1X2  [FIDUCIAL-1X2]  106.43,118.87 0 top
FID44  FIDUCIAL1X2  [FIDUCIAL-1X2]  60.71,93.47 0 top
FID45  FIDUCIAL1X2  [FIDUCIAL-1X2]  112.01,93.47 0 bottom
FID46  FIDUCIAL1X2  [FIDUCIAL-1X2]  157.73,118.87 0 bottom
FID47  FIDUCIAL1X2  [FIDUCIAL-1X2]  157.73,118.87 0 top
FID48  FIDUCIAL1X2  [FIDUCIAL-1X2]  112.01,93.47 0 top
J1  QWIIC_RIGHT_ANGLE  [JST04_1MM_RA]  52.83,11.94 90 top
J2  [JST-6-SMD-1.25MM-LOCKING]  8.13,14.48 270 top
J3  USB C  [USB-C-16P]  14.48,25.91 270 top
J4  JTAG  [2X5-PTH-1.27MM-NO_SILK]  32.26,11.94 180 top
J5  USB C  [USB-C-16P]  65.79,25.91 270 top
J6  [1X02_NO_SILK]  43.69,19.56 0 top
J7  [JST-6-SMD-1.25MM-LOCKING]  59.44,14.48 270 top
J8  QWIIC_RIGHT_ANGLE  [JST04_1MM_RA]  104.14,11.94 90 top
J9  JTAG  [2X5-PTH-1.27MM-NO_SILK]  83.57,11.94 180 top
J10  [1X02_NO_SILK]  95,19.56 0 top
J11  USB C  [USB-C-16P]  117.09,25.91 270 top
J12  [JST-6-SMD-1.25MM-LOCKING]  110.74,14.48 270 top
J13  QWIIC_RIGHT_ANGLE  [JST04_1MM_RA]  155.45,11.94 90 top
J14  JTAG  [2X5-PTH-1.27MM-NO_SILK]  134.87,11.94 180 top
J15  [1X02_NO_SILK]  146.3,19.56 0 top
J16  USB C  [USB-C-16P]  14.48,54.36 270 top
J17  [JST-6-SMD-1.25MM-LOCKING]  8.13,42.93 270 top
J18  QWIIC_RIGHT_ANGLE  [JST04_1MM_RA]  52.83,40.39 90 top
J19  JTAG  [2X5-PTH-1.27MM-NO_SILK]  32.26,40.39 180 top
J20  [1X02_NO_SILK]  43.69,48.01 0 top
J21  USB C  [USB-C-16P]  65.79,54.36 270 top
J22  [JST-6-SMD-1.25MM-LOCKING]  59.44,42.93 270 top
J23  QWIIC_RIGHT_ANGLE  [JST04_1MM_RA]  104.14,40.39 90 top
J24  JTAG  [2X5-PTH-1.27MM-NO_SILK]  83.57,40.39 180 top
J25  [1X02_NO_SILK]  95,48.01 0 top
J26  USB C  [USB-C-16P]  117.09,54.36 270 top
J27  [JST-6-SMD-1.25MM-LOCKING]  110.74,42.93 270 top
J28  QWIIC_RIGHT_ANGLE  [JST04_1MM_RA]  155.45,40.39 90 top
J29  JTAG  [2X5-PTH-1.27MM-NO_SILK]  134.87,40.39 180 top
J30  [1X02_NO_SILK]  146.3,48.01 0 top
J31  USB C  [USB-C-16P]  14.48,82.8 270 top
J32  [JST-6-SMD-1.25MM-LOCKING]  8.13,71.37 270 top
J33  QWIIC_RIGHT_ANGLE  [JST04_1MM_RA]  52.83,68.83 90 top
J34  JTAG  [2X5-PTH-1.27MM-NO_SILK]  32.26,68.83 180 top
J35  [1X02_NO_SILK]  43.69,76.45 0 top
J36  USB C  [USB-C-16P]  65.79,82.8 270 top
J37  [JST-6-SMD-1.25MM-LOCKING]  59.44,71.37 270 top
J38  QWIIC_RIGHT_ANGLE  [JST04_1MM_RA]  104.14,68.83 90 top
J39  JTAG  [2X5-PTH-1.27MM-NO_SILK]  83.57,68.83 180 top
J40  [1X02_NO_SILK]  95,76.45 0 top
J41  USB C  [USB-C-16P]  117.09,82.8 270 top
J42  [JST-6-SMD-1.25MM-LOCKING]  110.74,71.37 270 top
J43  QWIIC_RIGHT_ANGLE  [JST04_1MM_RA]  155.45,68.83 90 top
J44  JTAG  [2X5-PTH-1.27MM-NO_SILK]  134.87,68.83 180 top
J45  [1X02_NO_SILK]  146.3,76.45 0 top
J46  USB C  [USB-C-16P]  14.48,111.25 270 top
J47  [JST-6-SMD-1.25MM-LOCKING]  8.13,99.82 270 top
J48  QWIIC_RIGHT_ANGLE  [JST04_1MM_RA]  52.83,97.28 90 top
J49  JTAG  [2X5-PTH-1.27MM-NO_SILK]  32.26,97.28 180 top
J50  [1X02_NO_SILK]  43.69,104.9 0 top
J51  USB C  [USB-C-16P]  65.79,111.25 270 top
J52  [JST-6-SMD-1.25MM-LOCKING]  59.44,99.82 270 top
J53  QWIIC_RIGHT_ANGLE  [JST04_1MM_RA]  104.14,97.28 90 top
J54  JTAG  [2X5-PTH-1.27MM-NO_SILK]  83.57,97.28 180 top
J55  [1X02_NO_SILK]  95,104.9 0 top
J56  USB C  [USB-C-16P]  117.09,111.25 270 top
J57  [JST-6-SMD-1.25MM-LOCKING]  110.74,99.82 270 top
J58  QWIIC_RIGHT_ANGLE  [JST04_1MM_RA]  155.45,97.28 90 top
J59  JTAG  [2X5-PTH-1.27MM-NO_SILK]  134.87,97.28 180 top
J60  [1X02_NO_SILK]  146.3,104.9 0 top
JP1  JUMPER-SMT_3_2-NC_TRACE_SILK  [SMT-JUMPER_3_2-NC_TRACE_SILK]  96.27,15.75 270 top
JP2  JUMPER-SMT_3_2-NC_TRACE_SILK  [SMT-JUMPER_3_2-NC_TRACE_SILK]  147.57,15.75 270 top
JP3  JUMPER-SMT_3_2-NC_TRACE_SILK  [SMT-JUMPER_3_2-NC_TRACE_SILK]  44.96,44.2 270 top
JP4  JUMPER-SMT_3_2-NC_TRACE_SILK  [SMT-JUMPER_3_2-NC_TRACE_SILK]  96.27,44.2 270 top
JP5  JUMPER-SMT_3_2-NC_TRACE_SILK  [SMT-JUMPER_3_2-NC_TRACE_SILK]  147.57,44.2 270 top
JP6  JUMPER-SMT_3_2-NC_TRACE_SILK  [SMT-JUMPER_3_2-NC_TRACE_SILK]  44.96,72.64 270 top
JP7  JUMPER-SMT_3_2-NC_TRACE_SILK  [SMT-JUMPER_3_2-NC_TRACE_SILK]  96.27,72.64 270 top
JP8  JUMPER-SMT_3_2-NC_TRACE_SILK  [SMT-JUMPER_3_2-NC_TRACE_SILK]  147.57,72.64 270 top
JP9  JUMPER-SMT_3_2-NC_TRACE_SILK  [SMT-JUMPER_3_2-NC_TRACE_SILK]  44.96,15.75 270 top
JP10  JUMPER-SMT_3_2-NC_TRACE_SILK  [SMT-JUMPER_3_2-NC_TRACE_SILK]  44.96,101.09 270 top
JP11  JUMPER-SMT_3_2-NC_TRACE_SILK  [SMT-JUMPER_3_2-NC_TRACE_SILK]  96.27,101.09 270 top
JP12  JUMPER-SMT_3_2-NC_TRACE_SILK  [SMT-JUMPER_3_2-NC_TRACE_SILK]  147.57,101.09 270 top
LOGO1  SFE_LOGO_NAME_FLAME10_MM  [SFE_LOGO_NAME_FLAME_10MM]  98.04,30.1 0 top
LOGO2  SFE_LOGO_NAME_FLAME.1_INCH  [SFE_LOGO_NAME_FLAME_.1]  51.82,12.95 90 bottom
LOGO3  QWIIC_LOGO_CONNECTOR  [QWIIC_5.5MM]  50.42,11.94 90 top
LOGO4  OSHW-LOGOMINI  [OSHW-LOGO-MINI]  53.21,32.64 0 bottom
LOGO5  SFE_LOGO_NAME_FLAME10_MM  [SFE_LOGO_NAME_FLAME_10MM]  46.74,30.1 0 top
LOGO6  SFE_LOGO_NAME_FLAME.1_INCH  [SFE_LOGO_NAME_FLAME_.1]  103.12,12.95 90 bottom
LOGO7  OSHW-LOGOMINI  [OSHW-LOGO-MINI]  104.52,32.64 0 bottom
LOGO8  QWIIC_LOGO_CONNECTOR  [QWIIC_5.5MM]  101.73,11.94 90 top
LOGO9  SFE_LOGO_NAME_FLAME10_MM  [SFE_LOGO_NAME_FLAME_10MM]  149.35,30.1 0 top
LOGO10  SFE_LOGO_NAME_FLAME.1_INCH  [SFE_LOGO_NAME_FLAME_.1]  154.43,12.95 90 bottom
LOGO11  OSHW-LOGOMINI  [OSHW-LOGO-MINI]  155.83,32.64 0 bottom
LOGO12  QWIIC_LOGO_CONNECTOR  [QWIIC_5.5MM]  153.03,11.94 90 top
LOGO13  SFE_LOGO_NAME_FLAME10_MM  [SFE_LOGO_NAME_FLAME_10MM]  46.74,58.55 0 top
LOGO14  SFE_LOGO_NAME_FLAME.1_INCH  [SFE_LOGO_NAME_FLAME_.1]  51.82,41.4 90 bottom
LOGO15  OSHW-LOGOMINI  [OSHW-LOGO-MINI]  53.21,61.09 0 bottom
LOGO16  QWIIC_LOGO_CONNECTOR  [QWIIC_5.5MM]  50.42,40.39 90 top
LOGO17  SFE_LOGO_NAME_FLAME10_MM  [SFE_LOGO_NAME_FLAME_10MM]  98.04,58.55 0 top
LOGO18  SFE_LOGO_NAME_FLAME.1_INCH  [SFE_LOGO_NAME_FLAME_.1]  103.12,41.4 90 bottom
LOGO19  OSHW-LOGOMINI  [OSHW-LOGO-MINI]  104.52,61.09 0 bottom
LOGO20  QWIIC_LOGO_CONNECTOR  [QWIIC_5.5MM]  101.73,40.39 90 top
LOGO21  SFE_LOGO_NAME_FLAME10_MM  [SFE_LOGO_NAME_FLAME_10MM]  149.35,58.55 0 top
LOGO22  SFE_LOGO_NAME_FLAME.1_INCH  [SFE_LOGO_NAME_FLAME_.1]  154.43,41.4 90 bottom
LOGO23  OSHW-LOGOMINI  [OSHW-LOGO-MINI]  155.83,61.09 0 bottom
LOGO24  QWIIC_LOGO_CONNECTOR  [QWIIC_5.5MM]  153.03,40.39 90 top
LOGO25  SFE_LOGO_NAME_FLAME10_MM  [SFE_LOGO_NAME_FLAME_10MM]  46.74,87 0 top
LOGO26  SFE_LOGO_NAME_FLAME.1_INCH  [SFE_LOGO_NAME_FLAME_.1]  51.82,69.85 90 bottom
LOGO27  OSHW-LOGOMINI  [OSHW-LOGO-MINI]  53.21,89.54 0 bottom
LOGO28  QWIIC_LOGO_CONNECTOR  [QWIIC_5.5MM]  50.42,68.83 90 top
LOGO29  SFE_LOGO_NAME_FLAME10_MM  [SFE_LOGO_NAME_FLAME_10MM]  98.04,87 0 top
LOGO30  SFE_LOGO_NAME_FLAME.1_INCH  [SFE_LOGO_NAME_FLAME_.1]  103.12,69.85 90 bottom
LOGO31  OSHW-LOGOMINI  [OSHW-LOGO-MINI]  104.52,89.54 0 bottom
LOGO32  QWIIC_LOGO_CONNECTOR  [QWIIC_5.5MM]  101.73,68.83 90 top
LOGO33  SFE_LOGO_NAME_FLAME10_MM  [SFE_LOGO_NAME_FLAME_10MM]  149.35,87 0 top
LOGO34  SFE_LOGO_NAME_FLAME.1_INCH  [SFE_LOGO_NAME_FLAME_.1]  154.43,69.85 90 bottom
LOGO35  OSHW-LOGOMINI  [OSHW-LOGO-MINI]  155.83,89.54 0 bottom
LOGO36  QWIIC_LOGO_CONNECTOR  [QWIIC_5.5MM]  153.03,68.83 90 top
LOGO37  SFE_LOGO_NAME_FLAME10_MM  [SFE_LOGO_NAME_FLAME_10MM]  46.74,115.44 0 top
LOGO38  SFE_LOGO_NAME_FLAME.1_INCH  [SFE_LOGO_NAME_FLAME_.1]  51.82,98.3 90 bottom
LOGO39  OSHW-LOGOMINI  [OSHW-LOGO-MINI]  53.21,117.98 0 bottom
LOGO40  QWIIC_LOGO_CONNECTOR  [QWIIC_5.5MM]  50.42,97.28 90 top
LOGO41  SFE_LOGO_NAME_FLAME10_MM  [SFE_LOGO_NAME_FLAME_10MM]  98.04,115.44 0 top
LOGO42  SFE_LOGO_NAME_FLAME.1_INCH  [SFE_LOGO_NAME_FLAME_.1]  103.12,98.3 90 bottom
LOGO43  OSHW-LOGOMINI  [OSHW-LOGO-MINI]  104.52,117.98 0 bottom
LOGO44  QWIIC_LOGO_CONNECTOR  [QWIIC_5.5MM]  101.73,97.28 90 top
LOGO45  SFE_LOGO_NAME_FLAME10_MM  [SFE_LOGO_NAME_FLAME_10MM]  149.35,115.44 0 top
LOGO46  SFE_LOGO_NAME_FLAME.1_INCH  [SFE_LOGO_NAME_FLAME_.1]  154.43,98.3 90 bottom
LOGO47  OSHW-LOGOMINI  [OSHW-LOGO-MINI]  155.83,117.98 0 bottom
LOGO48  QWIIC_LOGO_CONNECTOR  [QWIIC_5.5MM]  153.03,97.28 90 top
MEAS  JUMPER-COMBO_2_NC_TRACE  [COMBO-JUMPER_2_NC_TRACE]  20.83,29.72 0 top
MEAS1  JUMPER-COMBO_2_NC_TRACE  [COMBO-JUMPER_2_NC_TRACE]  72.14,29.72 0 top
MEAS2  JUMPER-COMBO_2_NC_TRACE  [COMBO-JUMPER_2_NC_TRACE]  123.44,29.72 0 top
MEAS3  JUMPER-COMBO_2_NC_TRACE  [COMBO-JUMPER_2_NC_TRACE]  20.83,58.17 0 top
MEAS4  JUMPER-COMBO_2_NC_TRACE  [COMBO-JUMPER_2_NC_TRACE]  72.14,58.17 0 top
MEAS5  JUMPER-COMBO_2_NC_TRACE  [COMBO-JUMPER_2_NC_TRACE]  123.44,58.17 0 top
MEAS6  JUMPER-COMBO_2_NC_TRACE  [COMBO-JUMPER_2_NC_TRACE]  20.83,86.61 0 top
MEAS7  JUMPER-COMBO_2_NC_TRACE  [COMBO-JUMPER_2_NC_TRACE]  72.14,86.61 0 top
MEAS8  JUMPER-COMBO_2_NC_TRACE  [COMBO-JUMPER_2_NC_TRACE]  123.44,86.61 0 top
MEAS9  JUMPER-COMBO_2_NC_TRACE  [COMBO-JUMPER_2_NC_TRACE]  20.83,115.06 0 top
MEAS10  JUMPER-COMBO_2_NC_TRACE  [COMBO-JUMPER_2_NC_TRACE]  72.14,115.06 0 top
MEAS11  JUMPER-COMBO_2_NC_TRACE  [COMBO-JUMPER_2_NC_TRACE]  123.44,115.06 0 top
R1  1k  [0603]  44.96,11.94 270 top
R2  10k  [0603]  39.88,27.18 0 top
R3  2.2k  [0603]  47.5,17.02 270 top
R4  10k  [0603]  39.88,29.72 180 top
R5  4.7k  [0603]  17.02,17.02 90 top
R6  2.2k  [0603]  47.5,11.94 90 top
R7  5.1k  [0603]  17.02,23.37 90 top
R8  5.1k  [0603]  17.02,28.45 270 top
R9  1k  [0603]  39.88,11.94 270 top
R10  10k  [0603]  22.1,11.94 90 top
R11  100k  [0603]  70.87,11.94 90 top
R12  4.7k  [0603]  17.02,11.94 270 top
R13  100k  [0603]  79.76,28.45 270 top
R14  100k  [0603]  87.38,28.45 90 top
R15  100k  [0603]  82.3,28.45 90 top
R16  100k  [0603]  19.56,11.94 90 top
R17  100k  [0603]  28.45,28.45 270 top
R18  100k  [0603]  36.07,28.45 90 top
R19  100k  [0603]  30.99,28.45 90 top
R20  10k  [0603]  91.19,27.18 0 top
R21  10k  [0603]  91.19,29.72 180 top
R22  4.7k  [0603]  68.33,11.94 270 top
R23  4.7k  [0603]  68.33,17.02 90 top
R24  5.1k  [0603]  68.33,23.37 90 top
R25  5.1k  [0603]  68.33,28.45 270 top
R26  1k  [0603]  96.27,11.94 270 top
R27  1k  [0603]  91.19,11.94 270 top
R28  10k  [0603]  73.41,11.94 90 top
R29  2.2k  [0603]  98.81,17.02 270 top
R30  2.2k  [0603]  98.81,11.94 90 top
R31  100k  [0603]  122.17,11.94 90 top
R32  100k  [0603]  131.06,28.45 270 top
R33  100k  [0603]  138.68,28.45 90 top
R34  100k  [0603]  133.6,28.45 90 top
R35  10k  [0603]  142.49,27.18 0 top
R36  10k  [0603]  142.49,29.72 180 top
R37  4.7k  [0603]  119.63,11.94 270 top
R38  4.7k  [0603]  119.63,17.02 90 top
R39  5.1k  [0603]  119.63,23.37 90 top
R40  5.1k  [0603]  119.63,28.45 270 top
R41  1k  [0603]  147.57,11.94 270 top
R42  1k  [0603]  142.49,11.94 270 top
R43  10k  [0603]  124.71,11.94 90 top
R44  2.2k  [0603]  150.11,17.02 270 top
R45  2.2k  [0603]  150.11,11.94 90 top
R46  100k  [0603]  19.56,40.39 90 top
R47  100k  [0603]  28.45,56.9 270 top
R48  100k  [0603]  36.07,56.9 90 top
R49  100k  [0603]  30.99,56.9 90 top
R50  10k  [0603]  39.88,55.63 0 top
R51  10k  [0603]  39.88,58.17 180 top
R52  4.7k  [0603]  17.02,40.39 270 top
R53  4.7k  [0603]  17.02,45.47 90 top
R54  5.1k  [0603]  17.02,51.82 90 top
R55  5.1k  [0603]  17.02,56.9 270 top
R56  1k  [0603]  44.96,40.39 270 top
R57  1k  [0603]  39.88,40.39 270 top
R58  10k  [0603]  22.1,40.39 90 top
R59  2.2k  [0603]  47.5,45.47 270 top
R60  2.2k  [0603]  47.5,40.39 90 top
R61  100k  [0603]  70.87,40.39 90 top
R62  100k  [0603]  79.76,56.9 270 top
R63  100k  [0603]  87.38,56.9 90 top
R64  100k  [0603]  82.3,56.9 90 top
R65  10k  [0603]  91.19,55.63 0 top
R66  10k  [0603]  91.19,58.17 180 top
R67  4.7k  [0603]  68.33,40.39 270 top
R68  4.7k  [0603]  68.33,45.47 90 top
R69  5.1k  [0603]  68.33,51.82 90 top
R70  5.1k  [0603]  68.33,56.9 270 top
R71  1k  [0603]  96.27,40.39 270 top
R72  1k  [0603]  91.19,40.39 270 top
R73  10k  [0603]  73.41,40.39 90 top
R74  2.2k  [0603]  98.81,45.47 270 top
R75  2.2k  [0603]  98.81,40.39 90 top
R76  100k  [0603]  122.17,40.39 90 top
R77  100k  [0603]  131.06,56.9 270 top
R78  100k  [0603]  138.68,56.9 90 top
R79  100k  [0603]  133.6,56.9 90 top
R80  10k  [0603]  142.49,55.63 0 top
R81  10k  [0603]  142.49,58.17 180 top
R82  4.7k  [0603]  119.63,40.39 270 top
R83  4.7k  [0603]  119.63,45.47 90 top
R84  5.1k  [0603]  119.63,51.82 90 top
R85  5.1k  [0603]  119.63,56.9 270 top
R86  1k  [0603]  147.57,40.39 270 top
R87  1k  [0603]  142.49,40.39 270 top
R88  10k  [0603]  124.71,40.39 90 top
R89  2.2k  [0603]  150.11,45.47 270 top
R90  2.2k  [0603]  150.11,40.39 90 top
R91  100k  [0603]  19.56,68.83 90 top
R92  100k  [0603]  28.45,85.34 270 top
R93  100k  [0603]  36.07,85.34 90 top
R94  100k  [0603]  30.99,85.34 90 top
R95  10k  [0603]  39.88,84.07 0 top
R96  10k  [0603]  39.88,86.61 180 top
R97  4.7k  [0603]  17.02,68.83 270 top
R98  4.7k  [0603]  17.02,73.91 90 top
R99  5.1k  [0603]  17.02,80.26 90 top
R100  5.1k  [0603]  17.02,85.34 270 top
R101  1k  [0603]  44.96,68.83 270 top
R102  1k  [0603]  39.88,68.83 270 top
R103  10k  [0603]  22.1,68.83 90 top
R104  2.2k  [0603]  47.5,73.91 270 top
R105  2.2k  [0603]  47.5,68.83 90 top
R106  100k  [0603]  70.87,68.83 90 top
R107  100k  [0603]  79.76,85.34 270 top
R108  100k  [0603]  87.38,85.34 90 top
R109  100k  [0603]  82.3,85.34 90 top
R110  10k  [0603]  91.19,84.07 0 top
R111  10k  [0603]  91.19,86.61 180 top
R112  4.7k  [0603]  68.33,68.83 270 top
R113  4.7k  [0603]  68.33,73.91 90 top
R114  5.1k  [0603]  68.33,80.26 90 top
R115  5.1k  [0603]  68.33,85.34 270 top
R116  1k  [0603]  96.27,68.83 270 top
R117  1k  [0603]  91.19,68.83 270 top
R118  10k  [0603]  73.41,68.83 90 top
R119  2.2k  [0603]  98.81,73.91 270 top
R120  2.2k  [0603]  98.81,68.83 90 top
R121  100k  [0603]  122.17,68.83 90 top
R122  100k  [0603]  131.06,85.34 270 top
R123  100k  [0603]  138.68,85.34 90 top
R124  100k  [0603]  133.6,85.34 90 top
R125  10k  [0603]  142.49,84.07 0 top
R126  10k  [0603]  142.49,86.61 180 top
R127  4.7k  [0603]  119.63,68.83 270 top
R128  4.7k  [0603]  119.63,73.91 90 top
R129  5.1k  [0603]  119.63,80.26 90 top
R130  5.1k  [0603]  119.63,85.34 270 top
R131  1k  [0603]  147.57,68.83 270 top
R132  1k  [0603]  142.49,68.83 270 top
R133  10k  [0603]  124.71,68.83 90 top
R134  2.2k  [0603]  150.11,73.91 270 top
R135  2.2k  [0603]  150.11,68.83 90 top
R136  100k  [0603]  19.56,97.28 90 top
R137  100k  [0603]  28.45,113.79 270 top
R138  100k  [0603]  36.07,113.79 90 top
R139  100k  [0603]  30.99,113.79 90 top
R140  10k  [0603]  39.88,112.52 0 top
R141  10k  [0603]  39.88,115.06 180 top
R142  4.7k  [0603]  17.02,97.28 270 top
R143  4.7k  [0603]  17.02,102.36 90 top
R144  5.1k  [0603]  17.02,108.71 90 top
R145  5.1k  [0603]  17.02,113.79 270 top
R146  1k  [0603]  44.96,97.28 270 top
R147  1k  [0603]  39.88,97.28 270 top
R148  10k  [0603]  22.1,97.28 90 top
R149  2.2k  [0603]  47.5,102.36 270 top
R150  2.2k  [0603]  47.5,97.28 90 top
R151  100k  [0603]  70.87,97.28 90 top
R152  100k  [0603]  79.76,113.79 270 top
R153  100k  [0603]  87.38,113.79 90 top
R154  100k  [0603]  82.3,113.79 90 top
R155  10k  [0603]  91.19,112.52 0 top
R156  10k  [0603]  91.19,115.06 180 top
R157  4.7k  [0603]  68.33,97.28 270 top
R158  4.7k  [0603]  68.33,102.36 90 top
R159  5.1k  [0603]  68.33,108.71 90 top
R160  5.1k  [0603]  68.33,113.79 270 top
R161  1k  [0603]  96.27,97.28 270 top
R162  1k  [0603]  91.19,97.28 270 top
R163  10k  [0603]  73.41,97.28 90 top
R164  2.2k  [0603]  98.81,102.36 270 top
R165  2.2k  [0603]  98.81,97.28 90 top
R166  100k  [0603]  122.17,97.28 90 top
R167  100k  [0603]  131.06,113.79 270 top
R168  100k  [0603]  138.68,113.79 90 top
R169  100k  [0603]  133.6,113.79 90 top
R170  10k  [0603]  142.49,112.52 0 top
R171  10k  [0603]  142.49,115.06 180 top
R172  4.7k  [0603]  119.63,97.28 270 top
R173  4.7k  [0603]  119.63,102.36 90 top
R174  5.1k  [0603]  119.63,108.71 90 top
R175  5.1k  [0603]  119.63,113.79 270 top
R176  1k  [0603]  147.57,97.28 270 top
R177  1k  [0603]  142.49,97.28 270 top
R178  10k  [0603]  124.71,97.28 90 top
R179  2.2k  [0603]  150.11,102.36 270 top
R180  2.2k  [0603]  150.11,97.28 90 top
S1  Train  [TACTILE_SWITCH_SMD_RIGHT_ANGLE]  55.12,19.56 90 top
S2  Reset  [TACTILE_SWITCH_SMD_5.2MM]  77.22,11.94 90 top
S3  Reset  [TACTILE_SWITCH_SMD_5.2MM]  25.91,11.94 90 top
S4  Train  [TACTILE_SWITCH_SMD_RIGHT_ANGLE]  106.43,19.56 90 top
S5  Reset  [TACTILE_SWITCH_SMD_5.2MM]  128.52,11.94 90 top
S6  Train  [TACTILE_SWITCH_SMD_RIGHT_ANGLE]  157.73,19.56 90 top
S7  Reset  [TACTILE_SWITCH_SMD_5.2MM]  25.91,40.39 90 top
S8  Train  [TACTILE_SWITCH_SMD_RIGHT_ANGLE]  55.12,48.01 90 top
S9  Reset  [TACTILE_SWITCH_SMD_5.2MM]  77.22,40.39 90 top
S10  Train  [TACTILE_SWITCH_SMD_RIGHT_ANGLE]  106.43,48.01 90 top
S11  Reset  [TACTILE_SWITCH_SMD_5.2MM]  128.52,40.39 90 top
S12  Train  [TACTILE_SWITCH_SMD_RIGHT_ANGLE]  157.73,48.01 90 top
S13  Reset  [TACTILE_SWITCH_SMD_5.2MM]  25.91,68.83 90 top
S14  Train  [TACTILE_SWITCH_SMD_RIGHT_ANGLE]  55.12,76.45 90 top
S15  Reset  [TACTILE_SWITCH_SMD_5.2MM]  77.22,68.83 90 top
S16  Train  [TACTILE_SWITCH_SMD_RIGHT_ANGLE]  106.43,76.45 90 top
S17  Reset  [TACTILE_SWITCH_SMD_5.2MM]  128.52,68.83 90 top
S18  Train  [TACTILE_SWITCH_SMD_RIGHT_ANGLE]  157.73,76.45 90 top
S19  Reset  [TACTILE_SWITCH_SMD_5.2MM]  25.91,97.28 90 top
S20  Train  [TACTILE_SWITCH_SMD_RIGHT_ANGLE]  55.12,104.9 90 top
S21  Reset  [TACTILE_SWITCH_SMD_5.2MM]  77.22,97.28 90 top
S22  Train  [TACTILE_SWITCH_SMD_RIGHT_ANGLE]  106.43,104.9 90 top
S23  Reset  [TACTILE_SWITCH_SMD_5.2MM]  128.52,97.28 90 top
S24  Train  [TACTILE_SWITCH_SMD_RIGHT_ANGLE]  157.73,104.9 90 top
U1  AP2112K-3.3  [SOT23-5]  75.95,28.45 180 top
U2  ATSAMD21G-A  [TQFP-48]  32.26,20.83 180 top
U3  AP2112K-3.3  [SOT23-5]  24.64,28.45 180 top
U4  E19-915M30S  [E19-915MS1W]  29.72,20.83 270 bottom
U5  E19-915M30S  [E19-915MS1W]  81.03,20.83 270 bottom
U6  ATSAMD21G-A  [TQFP-48]  83.57,20.83 180 top
U7  AP2112K-3.3  [SOT23-5]  127.25,28.45 180 top
U8  E19-915M30S  [E19-915MS1W]  132.33,20.83 270 bottom
U9  ATSAMD21G-A  [TQFP-48]  134.87,20.83 180 top
U10  AP2112K-3.3  [SOT23-5]  24.64,56.9 180 top
U11  E19-915M30S  [E19-915MS1W]  29.72,49.28 270 bottom
U12  ATSAMD21G-A  [TQFP-48]  32.26,49.28 180 top
U13  AP2112K-3.3  [SOT23-5]  75.95,56.9 180 top
U14  E19-915M30S  [E19-915MS1W]  81.03,49.28 270 bottom
U15  ATSAMD21G-A  [TQFP-48]  83.57,49.28 180 top
U16  AP2112K-3.3  [SOT23-5]  127.25,56.9 180 top
U17  E19-915M30S  [E19-915MS1W]  132.33,49.28 270 bottom
U18  ATSAMD21G-A  [TQFP-48]  134.87,49.28 180 top
U19  AP2112K-3.3  [SOT23-5]  24.64,85.34 180 top
U20  E19-915M30S  [E19-915MS1W]  29.72,77.72 270 bottom
U21  ATSAMD21G-A  [TQFP-48]  32.26,77.72 180 top
U22  AP2112K-3.3  [SOT23-5]  75.95,85.34 180 top
U23  E19-915M30S  [E19-915MS1W]  81.03,77.72 270 bottom
U24  ATSAMD21G-A  [TQFP-48]  83.57,77.72 180 top
U25  AP2112K-3.3  [SOT23-5]  127.25,85.34 180 top
U26  E19-915M30S  [E19-915MS1W]  132.33,77.72 270 bottom
U27  ATSAMD21G-A  [TQFP-48]  134.87,77.72 180 top
U28  AP2112K-3.3  [SOT23-5]  24.64,113.79 180 top
U29  E19-915M30S  [E19-915MS1W]  29.72,106.17 270 bottom
U30  ATSAMD21G-A  [TQFP-48]  32.26,106.17 180 top
U31  AP2112K-3.3  [SOT23-5]  75.95,113.79 180 top
U32  E19-915M30S  [E19-915MS1W]  81.03,106.17 270 bottom
U33  ATSAMD21G-A  [TQFP-48]  83.57,106.17 180 top
U34  AP2112K-3.3  [SOT23-5]  127.25,113.79 180 top
U35  E19-915M30S  [E19-915MS1W]  132.33,106.17 270 bottom
U36  ATSAMD21G-A  [TQFP-48]  134.87,106.17 180 top
U$1  [1W1]  39.88,32.26 0 top
U$2  [RESET0]  25.91,7.75 0 top
U$3  [915MHZ0]  52.96,28.32 0 top
U$4  [TRAIN0]  52.58,19.56 90 top
U$5  [RADIO2]  43.81,32.26 0 top
U$6  [ACT3]  42.42,9.4 0 top
U$7  [LNK2]  37.34,9.4 0 top
U$8  [RESET0]  77.22,7.75 0 top
U$9  [ANTENNA1]  52.7,27.18 0 top
U$10  [RX1]  14.48,9.14 90 top
U$11  [TX0]  14.48,19.94 90 top
U$12  [#0]  13.08,11.3 0 top
U$13  [#1]  13.08,17.65 90 top
U$14  [R3]  13.08,12.7 90 top
U$15  [T2]  13.08,13.84 90 top
U$16  [C0]  13.08,15.11 90 top
U$17  [R1]  13.08,16.38 90 top
U$18  [LORASERIAL0]  42.42,33.53 0 top
U$19  [915MHZ0]  104.27,28.32 0 top
U$20  [ANTENNA1]  104.01,27.18 0 top
U$21  [RADIO2]  95.12,32.26 0 top
U$22  [ACT3]  93.73,9.4 0 top
U$23  [LNK2]  88.65,9.4 0 top
U$24  [RX1]  65.79,9.14 90 top
U$25  [TX0]  65.79,19.94 90 top
U$26  [#0]  64.39,11.3 0 top
U$27  [#1]  64.39,17.65 90 top
U$28  [R3]  64.39,12.7 90 top
U$29  [T2]  64.39,13.84 90 top
U$30  [C0]  64.39,15.11 90 top
U$31  [R1]  64.39,16.38 90 top
U$32  [LORASERIAL0]  93.73,33.53 0 top
U$33  [1W1]  91.19,32.26 0 top
U$34  [TRAIN0]  103.89,19.56 90 top
U$35  [RESET0]  128.52,7.75 0 top
U$36  [915MHZ0]  155.58,28.32 0 top
U$37  [ANTENNA1]  155.32,27.18 0 top
U$38  [RADIO2]  146.43,32.26 0 top
U$39  [ACT3]  145.03,9.4 0 top
U$40  [LNK2]  139.95,9.4 0 top
U$41  [RX1]  117.09,9.14 90 top
U$42  [TX0]  117.09,19.94 90 top
U$43  [#0]  115.7,11.3 0 top
U$44  [#1]  115.7,17.65 90 top
U$45  [R3]  115.7,12.7 90 top
U$46  [T2]  115.7,13.84 90 top
U$47  [C0]  115.7,15.11 90 top
U$48  [R1]  115.7,16.38 90 top
U$49  [LORASERIAL0]  145.03,33.53 0 top
U$50  [1W1]  142.49,32.26 0 top
U$51  [TRAIN0]  155.19,19.56 90 top
U$52  [RESET0]  25.91,36.2 0 top
U$53  [915MHZ0]  52.96,56.77 0 top
U$54  [ANTENNA1]  52.7,55.63 0 top
U$55  [RADIO2]  43.81,60.71 0 top
U$56  [ACT3]  42.42,37.85 0 top
U$57  [LNK2]  37.34,37.85 0 top
U$58  [RX1]  14.48,37.59 90 top
U$59  [TX0]  14.48,48.39 90 top
U$60  [#0]  13.08,39.75 0 top
U$61  [#1]  13.08,46.1 90 top
U$62  [R3]  13.08,41.15 90 top
U$63  [T2]  13.08,42.29 90 top
U$64  [C0]  13.08,43.56 90 top
U$65  [R1]  13.08,44.83 90 top
U$66  [LORASERIAL0]  42.42,61.98 0 top
U$67  [1W1]  39.88,60.71 0 top
U$68  [TRAIN0]  52.58,48.01 90 top
U$69  [RESET0]  77.22,36.2 0 top
U$70  [915MHZ0]  104.27,56.77 0 top
U$71  [ANTENNA1]  104.01,55.63 0 top
U$72  [RADIO2]  95.12,60.71 0 top
U$73  [ACT3]  93.73,37.85 0 top
U$74  [LNK2]  88.65,37.85 0 top
U$75  [RX1]  65.79,37.59 90 top
U$76  [TX0]  65.79,48.39 90 top
U$77  [#0]  64.39,39.75 0 top
U$78  [#1]  64.39,46.1 90 top
U$79  [R3]  64.39,41.15 90 top
U$80  [T2]  64.39,42.29 90 top
U$81  [C0]  64.39,43.56 90 top
U$82  [R1]  64.39,44.83 90 top
U$83  [LORASERIAL0]  93.73,61.98 0 top
U$84  [1W1]  91.19,60.71 0 top
U$85  [TRAIN0]  103.89,48.01 90 top
U$86  [RESET0]  128.52,36.2 0 top
U$87  [915MHZ0]  155.58,56.77 0 top
U$88  [ANTENNA1]  155.32,55.63 0 top
U$89  [RADIO2]  146.43,60.71 0 top
U$90  [ACT3]  145.03,37.85 0 top
U$91  [LNK2]  139.95,37.85 0 top
U$92  [RX1]  117.09,37.59 90 top
U$93  [TX0]  117.09,48.39 90 top
U$94  [#0]  115.7,39.75 0 top
U$95  [#1]  115.7,46.1 90 top
U$96  [R3]  115.7,41.15 90 top
U$97  [T2]  115.7,42.29 90 top
U$98  [C0]  115.7,43.56 90 top
U$99  [R1]  115.7,44.83 90 top
U$100  [LORASERIAL0]  145.03,61.98 0 top
U$101  [1W1]  142.49,60.71 0 top
U$102  [TRAIN0]  155.19,48.01 90 top
U$103  [RESET0]  25.91,64.64 0 top
U$104  [915MHZ0]  52.96,85.22 0 top
U$105  [ANTENNA1]  52.7,84.07 0 top
U$106  [RADIO2]  43.81,89.15 0 top
U$107  [ACT3]  42.42,66.29 0 top
U$108  [LNK2]  37.34,66.29 0 top
U$109  [RX1]  14.48,66.04 90 top
U$110  [TX0]  14.48,76.84 90 top
U$111  [#0]  13.08,68.2 0 top
U$112  [#1]  13.08,74.55 90 top
U$113  [R3]  13.08,69.6 90 top
U$114  [T2]  13.08,70.74 90 top
U$115  [C0]  13.08,72.01 90 top
U$116  [R1]  13.08,73.28 90 top
U$117  [LORASERIAL0]  42.42,90.42 0 top
U$118  [1W1]  39.88,89.15 0 top
U$119  [TRAIN0]  52.58,76.45 90 top
U$120  [RESET0]  77.22,64.64 0 top
U$121  [915MHZ0]  104.27,85.22 0 top
U$122  [ANTENNA1]  104.01,84.07 0 top
U$123  [RADIO2]  95.12,89.15 0 top
U$124  [ACT3]  93.73,66.29 0 top
U$125  [LNK2]  88.65,66.29 0 top
U$126  [RX1]  65.79,66.04 90 top
U$127  [TX0]  65.79,76.84 90 top
U$128  [#0]  64.39,68.2 0 top
U$129  [#1]  64.39,74.55 90 top
U$130  [R3]  64.39,69.6 90 top
U$131  [T2]  64.39,70.74 90 top
U$132  [C0]  64.39,72.01 90 top
U$133  [R1]  64.39,73.28 90 top
U$134  [LORASERIAL0]  93.73,90.42 0 top
U$135  [1W1]  91.19,89.15 0 top
U$136  [TRAIN0]  103.89,76.45 90 top
U$137  [RESET0]  128.52,64.64 0 top
U$138  [915MHZ0]  155.58,85.22 0 top
U$139  [ANTENNA1]  155.32,84.07 0 top
U$140  [RADIO2]  146.43,89.15 0 top
U$141  [ACT3]  145.03,66.29 0 top
U$142  [LNK2]  139.95,66.29 0 top
U$143  [RX1]  117.09,66.04 90 top
U$144  [TX0]  117.09,76.84 90 top
U$145  [#0]  115.7,68.2 0 top
U$146  [#1]  115.7,74.55 90 top
U$147  [R3]  115.7,69.6 90 top
U$148  [T2]  115.7,70.74 90 top
U$149  [C0]  115.7,72.01 90 top
U$150  [R1]  115.7,73.28 90 top
U$151  [LORASERIAL0]  145.03,90.42 0 top
U$152  [1W1]  142.49,89.15 0 top
U$153  [TRAIN0]  155.19,76.45 90 top
U$154  [RESET0]  25.91,93.09 0 top
U$155  [915MHZ0]  52.96,113.67 0 top
U$156  [ANTENNA1]  52.7,112.52 0 top
U$157  [RADIO2]  43.81,117.6 0 top
U$158  [ACT3]  42.42,94.74 0 top
U$159  [LNK2]  37.34,94.74 0 top
U$160  [RX1]  14.48,94.49 90 top
U$161  [TX0]  14.48,105.28 90 top
U$162  [#0]  13.08,96.65 0 top
U$163  [#1]  13.08,103 90 top
U$164  [R3]  13.08,98.04 90 top
U$165  [T2]  13.08,99.19 90 top
U$166  [C0]  13.08,100.46 90 top
U$167  [R1]  13.08,101.73 90 top
U$168  [LORASERIAL0]  42.42,118.87 0 top
U$169  [1W1]  39.88,117.6 0 top
U$170  [TRAIN0]  52.58,104.9 90 top
U$171  [RESET0]  77.22,93.09 0 top
U$172  [915MHZ0]  104.27,113.67 0 top
U$173  [ANTENNA1]  104.01,112.52 0 top
U$174  [RADIO2]  95.12,117.6 0 top
U$175  [ACT3]  93.73,94.74 0 top
U$176  [LNK2]  88.65,94.74 0 top
U$177  [RX1]  65.79,94.49 90 top
U$178  [TX0]  65.79,105.28 90 top
U$179  [#0]  64.39,96.65 0 top
U$180  [#1]  64.39,103 90 top
U$181  [R3]  64.39,98.04 90 top
U$182  [T2]  64.39,99.19 90 top
U$183  [C0]  64.39,100.46 90 top
U$184  [R1]  64.39,101.73 90 top
U$185  [LORASERIAL0]  93.73,118.87 0 top
U$186  [1W1]  91.19,117.6 0 top
U$187  [TRAIN0]  103.89,104.9 90 top
U$188  [RESET0]  128.52,93.09 0 top
U$189  [915MHZ0]  155.58,113.67 0 top
U$190  [ANTENNA1]  155.32,112.52 0 top
U$191  [RADIO2]  146.43,117.6 0 top
U$192  [ACT3]  145.03,94.74 0 top
U$193  [LNK2]  139.95,94.74 0 top
U$194  [RX1]  117.09,94.49 90 top
U$195  [TX0]  117.09,105.28 90 top
U$196  [#0]  115.7,96.65 0 top
U$197  [#1]  115.7,103 90 top
U$198  [R3]  115.7,98.04 90 top
U$199  [T2]  115.7,99.19 90 top
U$200  [C0]  115.7,100.46 90 top
U$201  [R1]  115.7,101.73 90 top
U$202  [LORASERIAL0]  145.03,118.87 0 top
U$203  [1W1]  142.49,117.6 0 top
U$204  [TRAIN0]  155.19,104.9 90 top
Y1  32.768kHz  [CRYSTAL-SMD-3.2X1.5MM]  39.88,19.56 270 top
Y2  32.768kHz  [CRYSTAL-SMD-3.2X1.5MM]  91.19,19.56 270 top
Y3  32.768kHz  [CRYSTAL-SMD-3.2X1.5MM]  142.49,19.56 270 top
Y4  32.768kHz  [CRYSTAL-SMD-3.2X1.5MM]  39.88,48.01 270 top
Y5  32.768kHz  [CRYSTAL-SMD-3.2X1.5MM]  91.19,48.01 270 top
Y6  32.768kHz  [CRYSTAL-SMD-3.2X1.5MM]  142.49,48.01 270 top
Y7  32.768kHz  [CRYSTAL-SMD-3.2X1.5MM]  39.88,76.45 270 top
Y8  32.768kHz  [CRYSTAL-SMD-3.2X1.5MM]  91.19,76.45 270 top
Y9  32.768kHz  [CRYSTAL-SMD-3.2X1.5MM]  142.49,76.45 270 top
Y10  32.768kHz  [CRYSTAL-SMD-3.2X1.5MM]  39.88,104.9 270 top
Y11  32.768kHz  [CRYSTAL-SMD-3.2X1.5MM]  91.19,104.9 270 top
Y12  32.768kHz  [CRYSTAL-SMD-3.2X1.5MM]  142.49,104.9 270 top

## Library data of the parts
BYP BYP1-BYP11 JP1-JP12 MEAS MEAS1-MEAS11 = SparkFun-Jumpers
C1 C3 C25 C37 C49 C61 C73 C85 C97 C109 C121 C133 = SparkFun-Capacitors; PROD_ID: CAP-13930
C2 C4 C26 C38 C50 C62 C74 C86 C98 C110 C122 C134 = SparkFun-Capacitors; PROD_ID: CAP-08604
C5 C9 C27 C39 C51 C63 C75 C87 C99 C111 C123 C135 = SparkFun-Capacitors; PROD_ID: CAP-07822
C6 C10 C12-C15 C18 C20-C22 C28 C31-C34 C40 C43-C46 C52 C55-C58 C64 C67-C70 C76 C79-C82 C88 C91-C94 C100 C103-C106 C112 C115-C118 C124 C127-C130 C136 C139-C142 = SparkFun-Capacitors; PROD_ID: CAP-00810
C7 C11 C29 C41 C53 C65 C77 C89 C101 C113 C125 C137 = SparkFun-Capacitors; PROD_ID: CAP-00811
C8 C17 C30 C42 C54 C66 C78 C90 C102 C114 C126 C138 = SparkFun-Capacitors; PROD_ID: CAP-08310
C16 C19 C23 C24 C35 C36 C47 C48 C59 C60 C71 C72 C83 C84 C95 C96 C107 C108 C119 C120 C131 C132 C143 C144 = SparkFun-Capacitors; PROD_ID: CAP-07881
D1 D3 D11 D16 D21 D26 D31 D36 D41 D46 D51 D56 = SparkFun-LED; PROD_ID: DIO-09003
D2 D7 D12 D17 D22 D27 D32 D37 D42 D47 D52 D57 = SparkFun-LED; PROD_ID: DIO-00821
D4 D8 D13 D18 D23 D28 D33 D38 D43 D48 D53 D58 = SparkFun-LED; PROD_ID: DIO-08575
D5 D9 D14 D19 D24 D29 D34 D39 D44 D49 D54 D59 = SparkFun-LED; PROD_ID: DIO-00819
D6 D10 D15 D20 D25 D30 D35 D40 D45 D50 D55 D60 = SparkFun-DiscreteSemi; PROD_ID: DIO-15359
E1-E12 = SparkFun-RF; PROD_ID: CONN-00827
E$1-E$4 FID1-FID48 LOGO1-LOGO48 = SparkFun-Aesthetics
E$5 E$6 = SparkFun-Retired
F1-F12 = SparkFun-Fuses; PROD_ID: RES-13945
J1 J8 J13 J18 J23 J28 J33 J38 J43 J48 J53 J58 = SparkFun-Connectors; PROD_ID: CONN-13694
J2 J7 J12 J17 J22 J27 J32 J37 J42 J47 J52 J57 = SparkFun-Connectors; PROD_ID: CONN-16497
J3 J5 J11 J16 J21 J26 J31 J36 J41 J46 J51 J56 = USB-C
J4 J6 J9 J10 J14 J15 J19 J20 J24 J25 J29 J30 J34 J35 J39 J40 J44 J45 J49 J50 J54 J55 J59 J60 = SparkFun-Connectors
R1 R9 R26 R27 R41 R42 R56 R57 R71 R72 R86 R87 R101 R102 R116 R117 R131 R132 R146 R147 R161 R162 R176 R177 = SparkFun-Resistors; PROD_ID: RES-07856
R2 R4 R10 R20 R21 R28 R35 R36 R43 R50 R51 R58 R65 R66 R73 R80 R81 R88 R95 R96 R103 R110 R111 R118 R125 R126 R133 R140 R141 R148 R155 R156 R163 R170 R171 R178 = SparkFun-Resistors; PROD_ID: RES-00824
R3 R6 R29 R30 R44 R45 R59 R60 R74 R75 R89 R90 R104 R105 R119 R120 R134 R135 R149 R150 R164 R165 R179 R180 = SparkFun-Resistors; PROD_ID: RES-08272
R5 R12 R22 R23 R37 R38 R52 R53 R67 R68 R82 R83 R97 R98 R112 R113 R127 R128 R142 R143 R157 R158 R172 R173 = SparkFun-Resistors; PROD_ID: RES-07857
R7 R8 R24 R25 R39 R40 R54 R55 R69 R70 R84 R85 R99 R100 R114 R115 R129 R130 R144 R145 R159 R160 R174 R175 = SparkFun-Resistors; PROD_ID: RES-12083
R11 R13-R19 R31-R34 R46-R49 R61-R64 R76-R79 R91-R94 R106-R109 R121-R124 R136-R139 R151-R154 R166-R169 = SparkFun-Resistors; PROD_ID: RES-07828
S1 S4 S6 S8 S10 S12 S14 S16 S18 S20 S22 S24 = SparkFun-Switches; PROD_ID: COMP-12265
S2 S3 S5 S7 S9 S11 S13 S15 S17 S19 S21 S23 = SparkFun-Switches; PROD_ID: SWCH-14139
U1 U3 U7 U10 U13 U16 U19 U22 U25 U28 U31 U34 = SparkFun-IC-Power; PROD_ID: VREG-12457
U2 U6 U9 U12 U15 U18 U21 U24 U27 U30 U33 U36 = samd21-temp; PROD_ID: IC-13064
U4 U5 U8 U11 U14 U17 U20 U23 U26 U29 U32 U35 = SparkFun-RF; PROD_ID: IC-14076
U$1-U$204 = output
Y1-Y12 = samd21-temp; PROD_ID: XTAL-13062